# Altium PCB main.PcbDoc
Units mm, origin at the board's own origin, x right, y up, seen from the top; angles counter-clockwise.
Board outline 19.69 x 25.4 mm, 2 copper layers (Top Layer, Bottom Layer); 9 components, 8 nets, 35 pads, 2 vias.
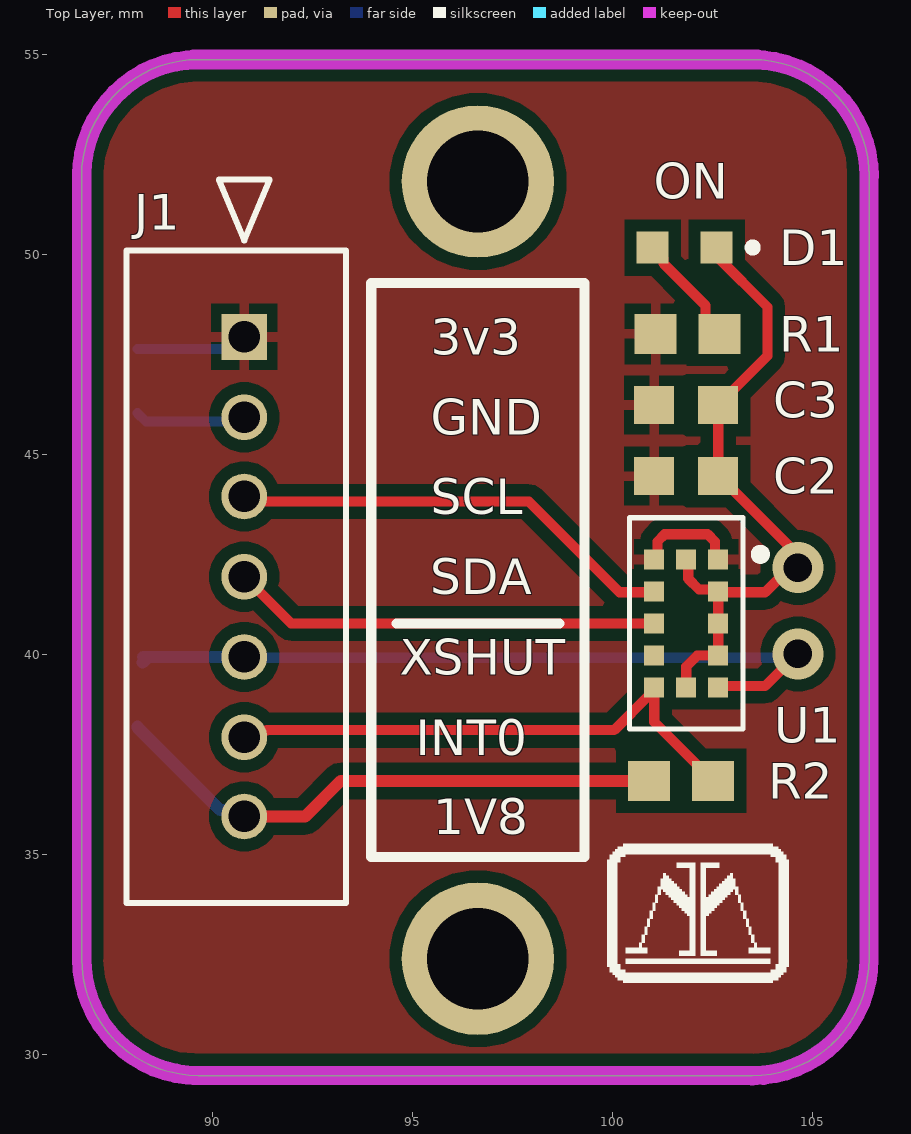
[diagram p0: Top Layer view]
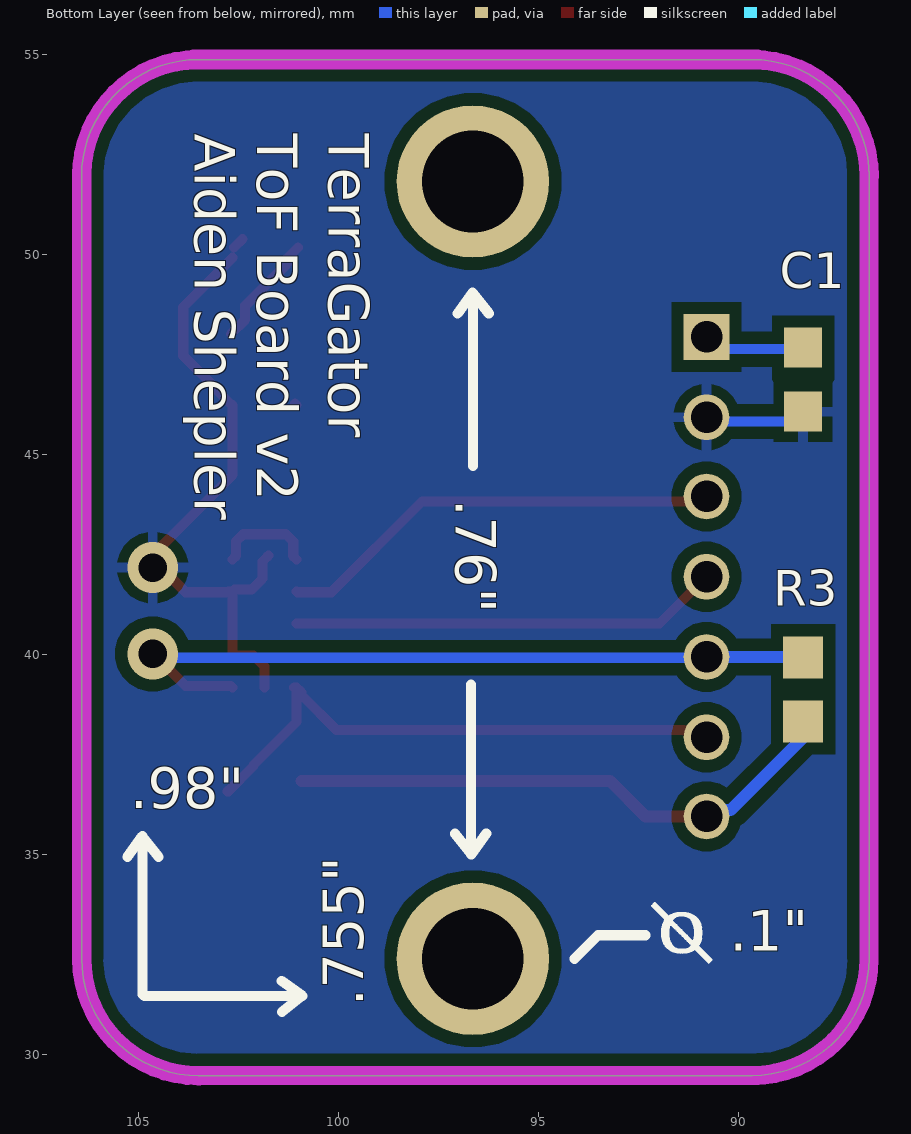
[diagram p1: Bottom Layer view, seen from below]

## Layer stack, top to bottom
Top Solder: solder mask 0.0102, Solder Resist, Dk 3.5
Top Layer: signal copper 0.0356
Dielectric 1: dielectric 0.32, FR-4, Dk 4.8
Bottom Layer: signal copper 0.0356
Bottom Solder: solder mask 0.0102, Solder Resist, Dk 3.5

## Board outline
86.741,32.385 86.741,52.07 86.738,51.94 cw(c89.662,51.94) 89.662,54.864 89.535,54.864 103.632,54.864 103.505,54.864 cw(c103.505,51.94) 106.429,51.94 106.426,52.07 106.426,32.385 cw(c103.502,32.385) 103.502,29.461 103.505,29.464 89.662,29.464 cw(c89.662,32.385)

## Design rules (kind name [scope] priority, off if disabled: settings)
BoardOutlineClearance [All] p1: gap=0.2 ignorepadtopadclearanceinfootprint=FALSE
Clearance "inPolygon Clearance" [InPolygon] p1: gap=0.3 ignorepadtopadclearanceinfootprint=TRUE // this rule ensures that every net within a polygon of a different net has a set clearance from the poly
Clearance "Different Diff Pair" [All] p2: gap=0.2 ignorepadtopadclearanceinfootprint=TRUE
Clearance "Same Diff Pair" [All] p3: gap=0.1 ignorepadtopadclearanceinfootprint=TRUE
Clearance "Different Nets" [not InAnyDifferentialPair] p4: gap=0.3 ignorepadtopadclearanceinfootprint=TRUE except(0.1: Arc-SMDPad Arc-THPad Arc-Via Arc-Text Track-SMDPad Track-THPad Track-Via Track-Text SMDPad-Text THPad-Text Via-Text Fill-Text Poly-Text Region-Text Text-Text; 0.12: Arc-Arc Arc-Track Track-Track; 0.15: SMDPad-SMDPad SMDPad-THPad SMDPad-Via THPad-THPad THPad-Via Via-Via; 0.2: Arc-Hole Track-Hole SMDPad-Hole THPad-Hole Via-Hole Fill-Hole Poly-Hole Region-Hole Text-Hole)
Clearance "Same Net" [not InAnyDifferentialPair] p5: gap=0 ignorepadtopadclearanceinfootprint=TRUE except(0.1: THPad-Via; 0.18: Arc-Arc Arc-Track Track-Track)
ComponentClearance [All] p1: gap=0.102 collisioncheckmode=3 verticalgap=0.102 showdistances=TRUE
DiffPairsRouting "Ethernet Routing" [InDifferentialPairClass('Ethernet_Pairs')] p1: maxlimit=0.2 minlimit=0.2 mostfreqgap=0.2 toplayer_minwidth=0.25 toplayer_maxwidth=0.25 toplayer_prefwidth=0.25 bottomlayer_minwidth=0.25 bottomlayer_maxwidth=0.25 bottomlayer_prefwidth=0.25 impedanceprofiledriven=TRUE impedanceprofileid={6C839EF7-FC3E-46DE-8B8A-5992B6406308} maxuncoupledlength=12.7
DiffPairsRouting "USB Routing" [InDifferentialPairClass('USB_Pairs')] p2: maxlimit=0.127 minlimit=0.127 mostfreqgap=0.127 toplayer_minwidth=0.23 toplayer_maxwidth=0.23 toplayer_prefwidth=0.23 bottomlayer_minwidth=0.23 bottomlayer_maxwidth=0.23 bottomlayer_prefwidth=0.23 impedanceprofiledriven=TRUE impedanceprofileid={44F334F2-7DCA-476F-8978-DAF7B35AC101} maxuncoupledlength=12.7
DiffPairsRouting "CAN Routing" [InDifferentialPairClass('CAN_Pairs')] p3: maxlimit=0.5 minlimit=0.5 mostfreqgap=0.5 toplayer_minwidth=0.201 toplayer_maxwidth=0.201 toplayer_prefwidth=0.201 bottomlayer_minwidth=0.201 bottomlayer_maxwidth=0.201 bottomlayer_prefwidth=0.201 impedanceprofiledriven=TRUE impedanceprofileid={655150C0-0DB8-45A2-9C08-8742605C1D3F} maxuncoupledlength=12.7
Height [All] p1: minheight=0 maxheight=1816.048 prefheight=12.7
HoleSize [All] p1: absolutevalues=TRUE maxlimit=6.3 minlimit=0.3 maxpercent=80.000 minpercent=20.000
HoleToHoleClearance [All] p1: gap=0.25 allowstackedmicrovias=FALSE
Length [All] p1: maxlimit=43.432 minlimit=0 usedelayunits=TRUE mindelay=0.000000 maxdelay=10000.000000
MatchedLengths "Diff Pair Matched Delays" [InDifferentialPairClass('Ethernet_Pairs') or InDifferentialPairClass('USB_Pairs') or InDifferentialPairClass('CAN_Pairs')] p1: tolerance=5 checknetsindiffpair=TRUE checkdiffpairvsdiffpair=FALSE checkxsignals=FALSE checkothers=FALSE usedelayunits=TRUE delaytolerance=100.000000
MinimumAnnularRing [All] p1: minimumring=0.1
MinimumSolderMaskSliver [All] p1: minsoldermaskwidth=0
PlaneClearance "Supply Net Clearance" [InNetClass('Supply_Nets')] p1: clearance=0.5
PlaneClearance "All Nets" [All] p2: clearance=0.3
PolygonConnect "Supply Nets" [InNetClass('Supply_Nets')] p1: connectstyle=Direct reliefconductorwidth=0.3 reliefentries=4 polygonreliefangle="90 Angle" airgapwidth=0.254
PolygonConnect General [All] p2: connectstyle=Relief reliefconductorwidth=0.254 reliefentries=4 polygonreliefangle="90 Angle" airgapwidth=0.254
RoutingVias [All] p1: holewidth=0.2 width=0.35 viastyle="Through Hole" minholewidth=0.15 minwidth=0.3 maxholewidth=6.3 maxwidth=6.55
SilkToSilkClearance [All] p1: silktosilkclearance=0
SilkToSolderMaskClearance [All] p1: minsilkscreentomaskgap=0 clearancetoexposedcopper=TRUE
SolderMaskExpansion [All] p1: expansion=0.075 istentingtop=FALSE
SupplyNets "Schematic Supply Nets_4" [InNet('1V8')] p1: voltage=0.000
SupplyNets "Schematic Supply Nets_2" [InNet('3V3')] p2: voltage=0.000
SupplyNets "Schematic Supply Nets_3" [InNet('GND')] p3: voltage=0.000
UnRoutedNet [All] p1: checkbadconnections=TRUE
Width [All] p1: maxlimit=100 minlimit=0.1 preferedwidth=0.3
Width "nRF Width" [InNetClass('nRF Signal')] p2: maxlimit=0.379 minlimit=0.379 preferedwidth=0.379 impedanceprofiledriven=TRUE impedanceprofileid={F40AD8AA-2A64-4F02-A627-F394B910E812} minimp=50.000000 maximp=50.000000 favimp=50.000000 checkconnectedcopper=TRUE
20 further rules are at their usual default settings.

## Components (designator, comment, footprint, x,y, rotation, side; value= is the part's Value field where it differs from the comment)
C1 "Cap" CAPC0603 88.392,46.863 r270 bottom value=100nF
C2 "Cap" CAPC0603 101.854,44.45 r0 top value=100nF
C3 "Cap" CAPC0603 101.854,46.228 r0 top value=4.7uF
D1 "0603 LED" "0603 (LED)" 101.816,50.165 r180 top
J1 "MOLEX_SHERLOCK_1x7_CONN" CON_353620750 90.805,47.93 r90 top
R1 "Res" RES0603 101.892,48.006 r0 top value=220
R2 "Res" RES0603 101.727,36.83 r0 top value=10k
R3 "Res" RES0603 88.392,39.116 r90 bottom value=10k
U1 "VL53L1CXV0FY/1" "LGA-12 (VL53L1CXV0FY/1)" 101.854,40.767 r0 top

## Footprints (in the part's own frame and the unit in brackets; to place one, negate y for a bottom-side part, rotate by r counter-clockwise, add the part's x,y. Pads: shape width x height; smd on the part's side, far side on the other; paste and mask are expansions set on the pad)
"0603 (LED)" [mm] "0603 package for LED"
  rect 0.8x0.8 smd: A(0.8,0) C(-0.8,0)
  silkscreen extent -1.8,-0.1 -1.6,0.1, body extent -0.8,-0.4 0.8,0.4, height 0.7
CAPC0603 [mm] "Chip Capacitor, 2-Leads, Body 1.60x0.80mm, IPC Medium Density"
  rect 1x0.95 smd: 1(-0.8,0) 2(0.8,0)
  body extent -0.88,-0.48 0.87,0.48, height 0.8
CON_353620750 [mil]
  rect 45x45 / inner round 45 / far side rect 45x45 hole 31: 1(0,0)
  round 45 hole 31: 2(-79,0) 3(-157,0) 4(-236,0) 5(-315,0) 6(-394,0) 7(-472,0)
  silkscreen extent -557,-100 155,116, body extent -556,-100 86,118, height 337
"LGA-12 (VL53L1CXV0FY/1)" [mm] "12 pin LGA for 4.9 x 2.5 x 1.56 mm package"
  rect 0.5x0.5 smd: 1(0.8,1.6) 2(0.8,0.8) 3(0.8,0) 4(0.8,-0.8) 5(0.8,-1.6) 6(0,-1.6) 7(-0.8,-1.6) 8(-0.8,-0.8) 9(-0.8,0) 10(-0.8,0.8) 11(-0.8,1.6) 12(0,1.6)
  silkscreen extent -1.42,-2.64 1.97,2.64, body extent -1.25,-2.45 1.25,2.45, height 1.6
RES0603 [mm] "Chip Resistor, 2-Leads, Body 1.60x0.80mm, IPC Medium Density"
  rect 1.05x1 smd: 1(-0.8,0) 2(0.8,0)
  body extent -0.88,-0.48 0.87,0.47, height 0.8

## Part data
C1 C2 C3: Supplier Part Number 1=1276-1000-1-ND, Supplier 1=Digi-Key
D1: "150060SS75000"
J1: "1x7 2mm pitch sherlock connector", Package=None, Availability=Unavailable, MP=353620750, Price=None
R1 R2 R3: "SMD, RES0603", Supplier Part Number 1=RMCF0603JT10K0CT-ND, Supplier 1=Digi-Key
U1: "ToF Optical Sensor 157.480 (4m) I²C Output from STMelectronics", Package="LGA-12 STMicroelectronics", Availability="In Stock", Check_prices=https://www.snapeda.com/parts/VL53L1CXV0FY/1/STMicroelectronics/view-part/?ref=eda, MF=STMicroelectronics, MP=VL53L1CXV0FY/1, Price=None, Purchase-URL=https://pricing.snapeda.com/search/part/VL53L1CXV0FY/1/?ref=eda, SnapEDA_Link=https://www.snapeda.com/parts/VL53L1CXV0FY/1/STMicroelectronics/view-part/?ref=snap

## Free pads (board coordinates)
  round 3.81 hole 2.54: 1(96.647,32.385) 1(96.647,51.816)

## Via types
v1: diameter 1.27, hole 0.711, Top Layer to Bottom Layer, 2 vias

## Nets (pads, with @x,y where several pads share a name; then routed paths per layer and width w, separated by ;. In a path a pad name is that pad's centre, name@x,y a point inside that pad or via, vN(x,y) a via of type N, cw(c..) or ccw(c..) an arc to the next point about the centre after c; other vN are vias at no path point)
1V8: J1.7 R2.1 R3.1 | length 14.1
  Top Layer w0.3: J1.7 92.329,35.941 93.218,36.83 R2.1
  Bottom Layer w0.3: R3.1@88.138,38.189 88.138,38.164 90.2,36.102 90.644,36.102 J1.7
3V3: C1.1 C2.1 C3.1 J1.1 R1.1 U1.1 U1.11 | length 5.5
  Top Layer w0.254: J1.1@90.424,47.815 J1.1@90.678,47.815 ; U1.11 101.136,42.449 101.136,42.815 101.319,42.998 102.389,42.998 102.572,42.815 102.572,42.449 U1.1 ; C3.1 C3.1@101.092,46.266
  Bottom Layer w0.254: C1.1@88.138,47.625 90.488,47.625 J1.1@90.678,47.815
GND: C1.2 C2.2 C3.2 D1.C J1.2 U1.2 U1.3 U1.4 U1.6 U1.12 | length 19.3
  Top Layer w0.254: U1.12@101.758,42.463 U1.12 101.904,42.317 101.904,41.886 102.173,41.617 102.604,41.617 U1.2 ; U1.6 101.854,39.691 102.13,39.967 U1.4 U1.3 U1.2 ; D1.C@102.407,50.374 D1.C ; D1.C@102.654,49.911 103.886,48.679 103.886,47.46 103.027,46.601 103.027,46.576 102.679,46.228 C3.2 102.654,44.475 104.454,42.675 104.454,42.358 v1(104.648,42.164) 104.443,42.164 103.827,41.548 102.777,41.548 102.758,41.567 U1.2
  Bottom Layer w0.254: C1.2@88.138,46.025 88.348,45.815 J1.2@90.678,45.815
INT0: J1.6 R2.2 U1.7 | length 14.2
  Top Layer w0.254: J1.6 90.975,38.092 91.369,38.092 91.377,38.1 100.052,38.1 100.931,38.979 100.931,39.044 U1.7 ; U1.7@101.119,39.167 U1.7 ; R2.2@102.783,36.574 102.758,36.574 102.129,37.203 102.129,37.228 101.054,38.303 U1.7
NetD1_A: D1.A R1.2 | length 2.9
  Top Layer w0.254: D1.A 101.289,49.892 101.289,49.762 102.341,48.71 102.341,48.357 R1.2
SCL: J1.3 U1.10 | length 11.3
  Top Layer w0.254: J1.3@90.678,43.815 97.917,43.815 100.187,41.545 101.032,41.545 U1.10
SDA: J1.4 U1.9 | length 10.8
  Top Layer w0.254: J1.4@90.678,41.815 90.932,41.815 91.98,40.767 U1.9
XSHUT: J1.5 R3.2 U1.5 | length 18.9
  Top Layer w0.254: U1.5 102.692,39.205 103.827,39.205 104.627,40.005 v1(104.648,40.005)
  Bottom Layer w0.254: J1.5@90.805,39.91 104.553,39.91 v1(104.648,40.005)
  Bottom Layer w0.3: R3.2@88.265,39.789 R3.2@88.405,39.929 ; R3.2@88.278,39.929 J1.5
pads on no net: U1.8

## Polygon pours and split planes (outlines as drawn)
3V3 on Top Layer "3v3_TL" (solid, pour order 2): 86.983,32.385 ccw(c89.662,32.385) 89.662,29.706 103.505,29.706 103.54,29.703 ccw(c103.502,32.385) 106.184,32.385 106.184,52.062 ccw(c103.505,51.94) 103.673,54.617 103.632,54.614 89.662,54.614 89.599,54.622 ccw(c89.662,51.94) 86.983,52.062
GND on Bottom Layer "GND_BL" (solid, pour order 3): 86.741,32.385 86.741,52.07 86.738,51.94 cw(c89.662,51.94) 89.662,54.864 89.535,54.864 103.632,54.864 103.505,54.864 cw(c103.505,51.94) 106.429,51.94 106.426,52.07 106.426,32.385 cw(c103.502,32.385) 103.502,29.461 103.505,29.464 89.662,29.464 cw(c89.662,32.385)

## Keep-outs
Keep-Out Layer:
  lines w0.483: 86.738,51.94 cw(c89.662,51.94) 89.662,54.864 ; 86.741,52.07 86.741,32.385 ccw(c89.662,32.385) 89.662,29.464 ; 89.535,29.464 103.505,29.464 ; 103.502,29.461 ccw(c103.502,32.385) 106.426,32.385 106.426,52.07 ; 103.505,54.864 cw(c103.505,51.94) 106.429,51.94
  lines w0.5: 89.535,54.864 103.632,54.864

## Silkscreen, mask and mechanical layers (free items; w line width, h text height)
Top Overlay:
  drawing of 23 lines, arcs and shapes, not listed
  text "ON" at 101.041,51.384 h0.89
  text "3v3" at 95.462,47.485 h0.89
  text "GND" at 95.462,45.479 h0.89
  text "SCL" at 95.462,43.498 h0.89
  text "SDA" at 95.453,41.491 h0.89
  text "XSHUT" at 94.691,39.484 h0.89
  text "INT0" at 95.092,37.478 h0.89
  text "1V8" at 95.536,35.497 h0.89
Bottom Overlay:
  drawing of 16 lines, arcs and shapes, not listed
  text "TerraGator" at 100.254,53.01 h1.02 r90
  text "ToF Board v2" at 102.032,53.01 h1.02 r90
  text "Aiden Shepler" at 103.598,53.01 h1.02 r90
  text ".76\"" at 97.079,43.866 h1.02 r90
  text ".98\"" at 105.207,36.144 h1.02
  text ".1\"" at 90.221,32.588 h1.02
  text ".755\"" at 99.39,31.191 h1.02 r270